# Altium PCB F4SDR.PcbDoc (part 1 of 2)
Units mil, origin at the board's own origin, x right, y up, seen from the top; angles counter-clockwise.
Board outline 1968.5 x 1968.5 mil, 4 copper layers (Top Layer, Internal Plane 1, Signal Layer 1, Bottom Layer), stack 64.634 mil thick; 238 components, 172 nets, 770 pads, 321 vias.
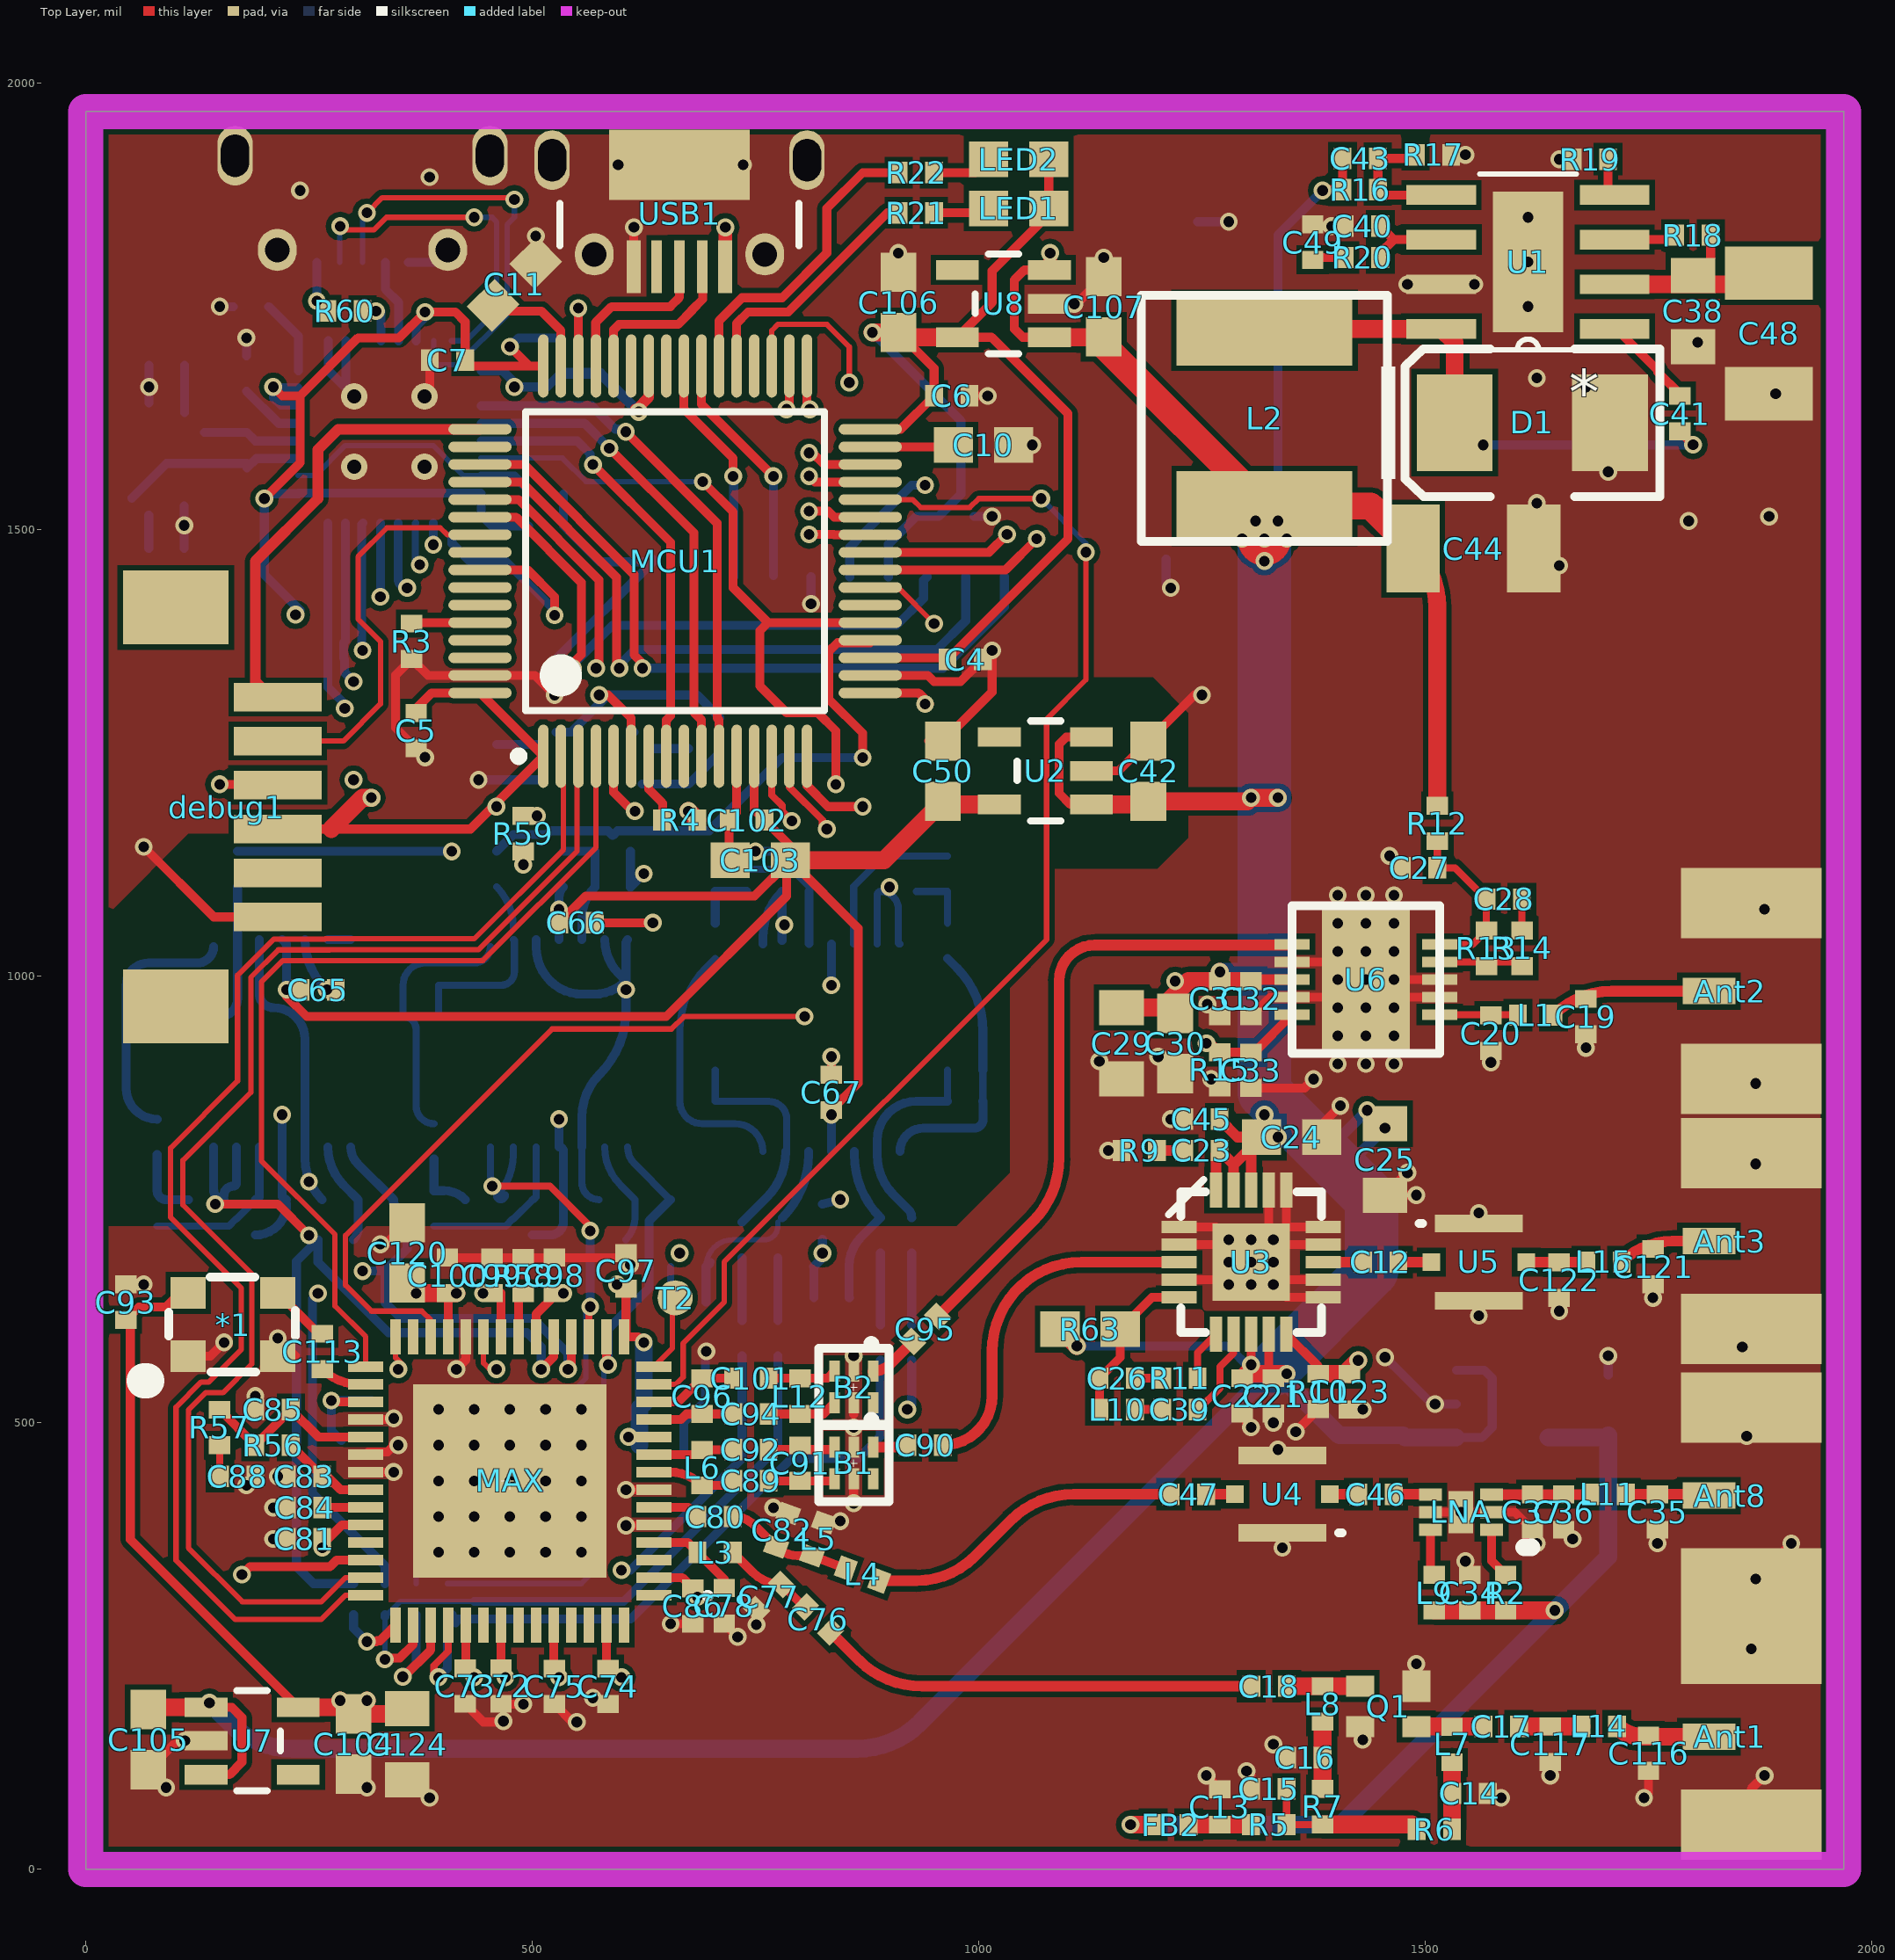
[diagram p0: Top Layer view]
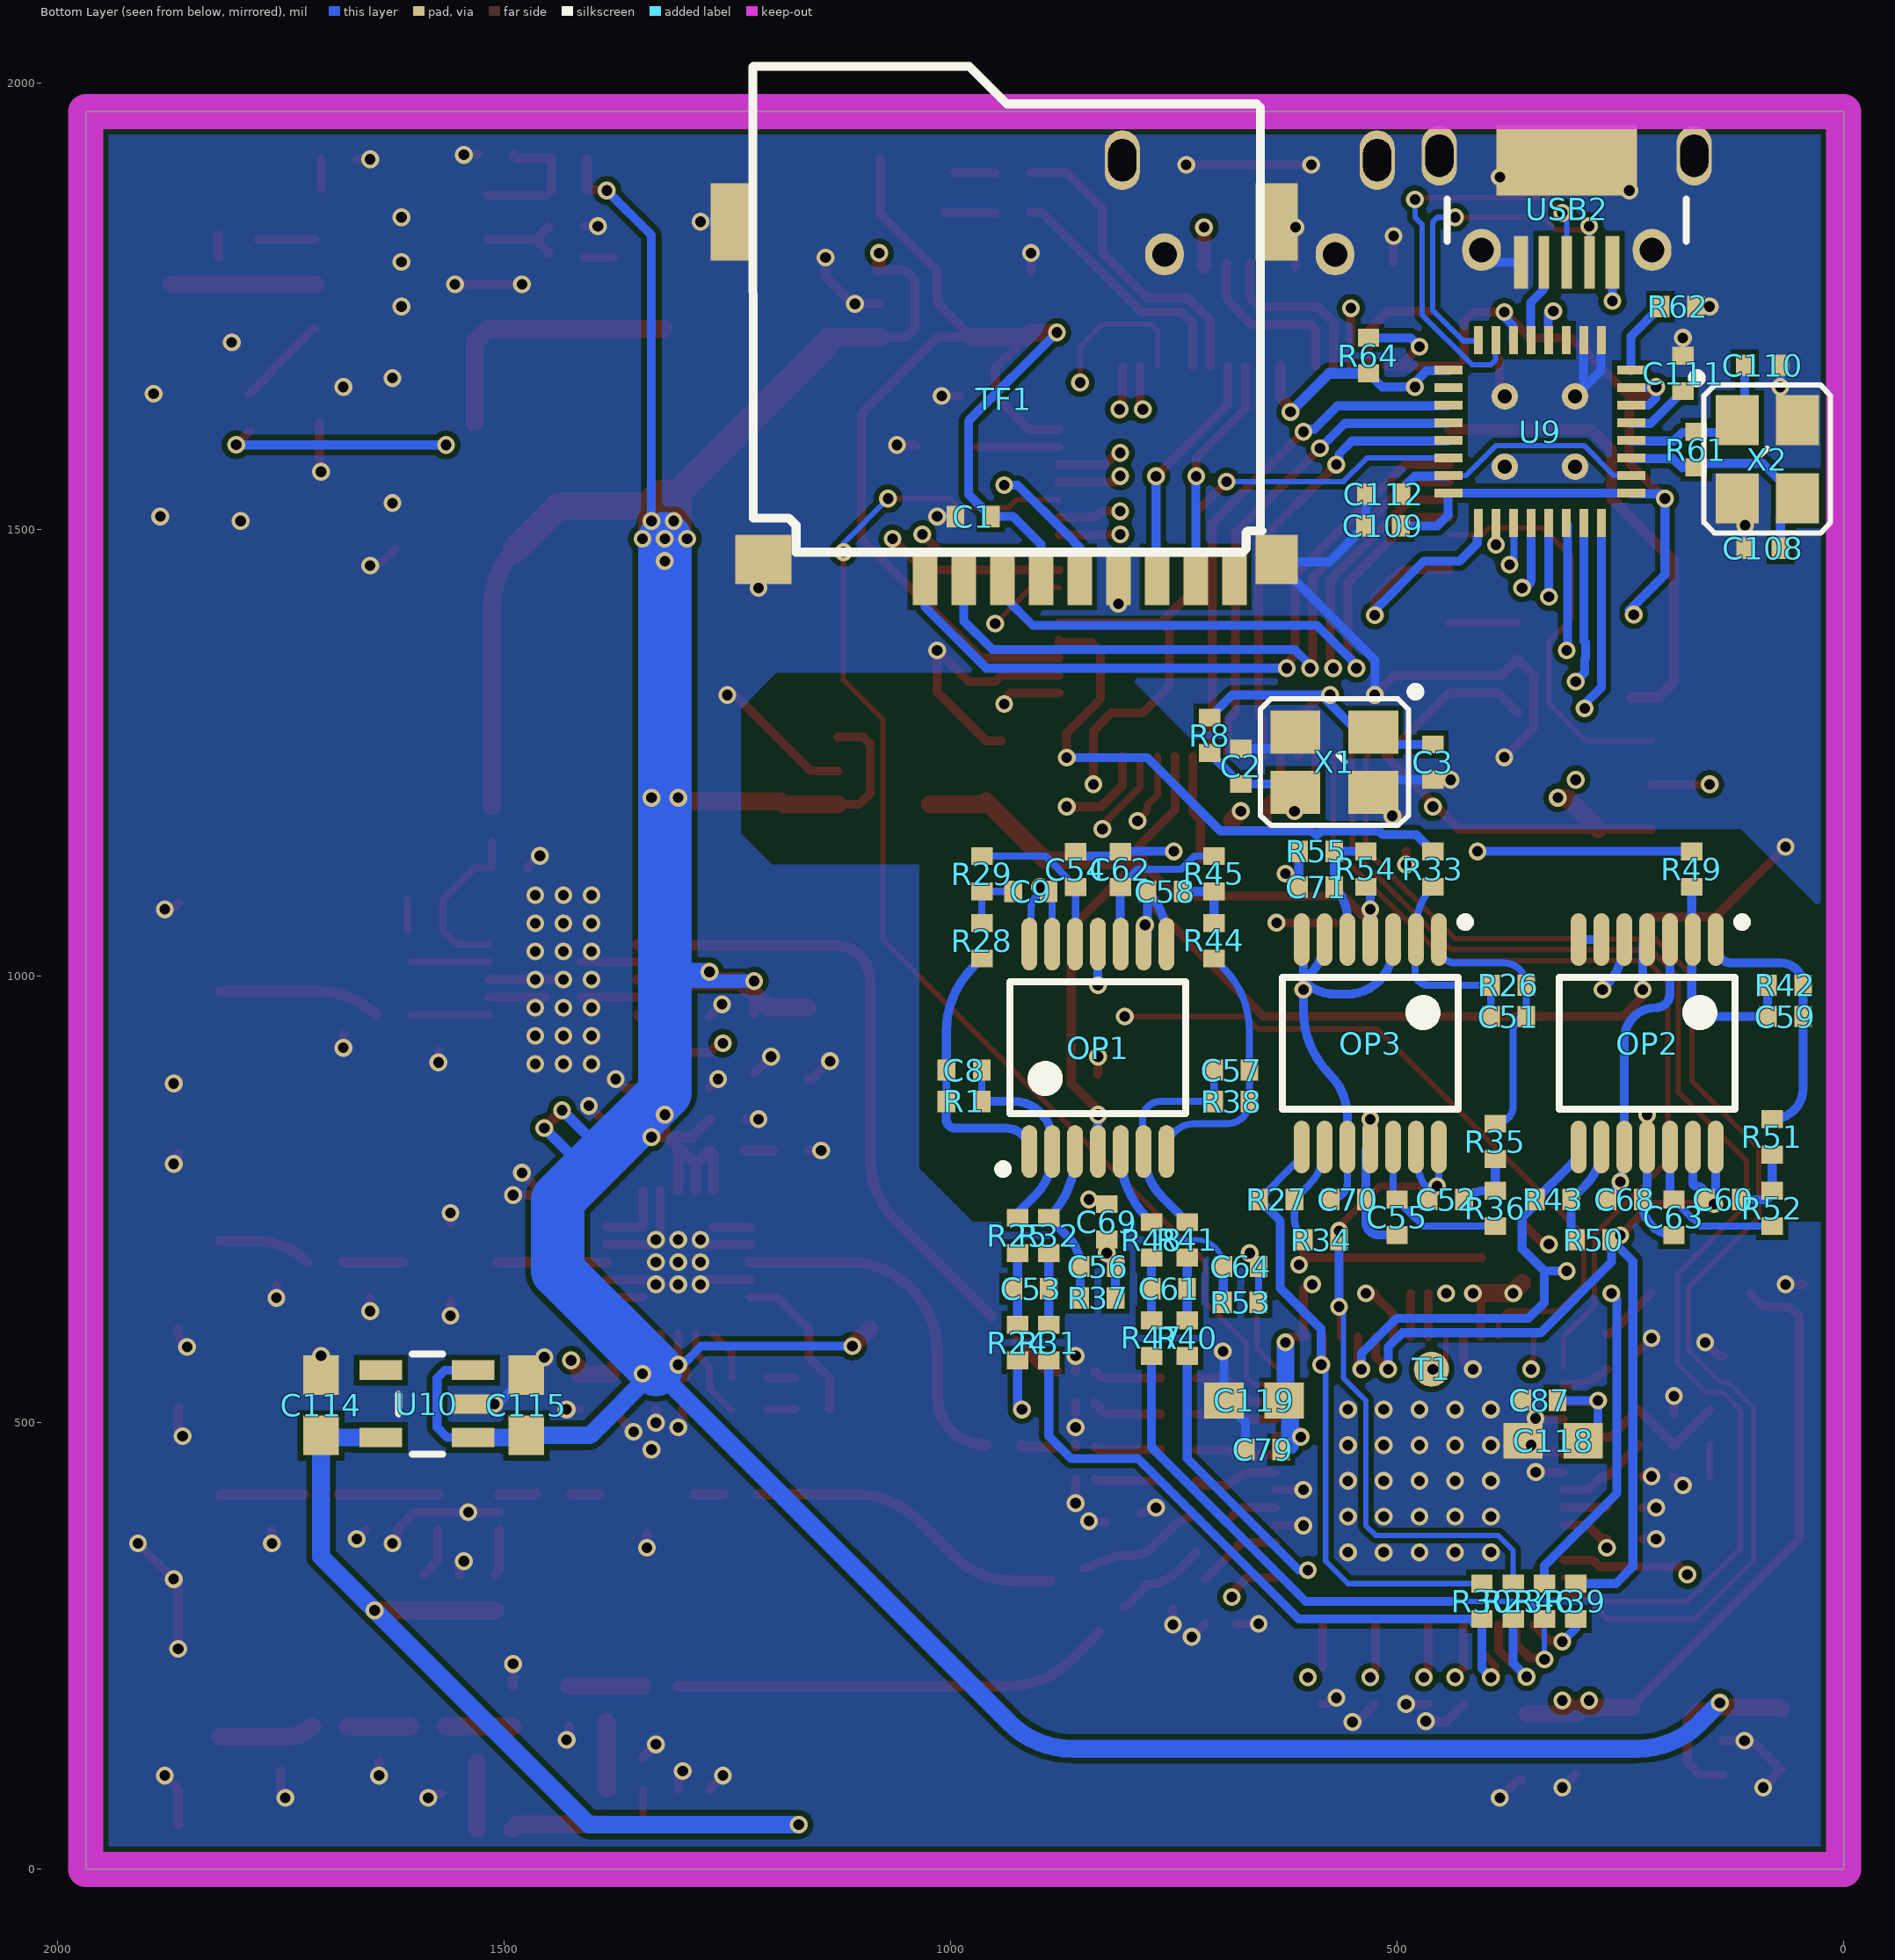
[diagram p1: Bottom Layer view, seen from below]
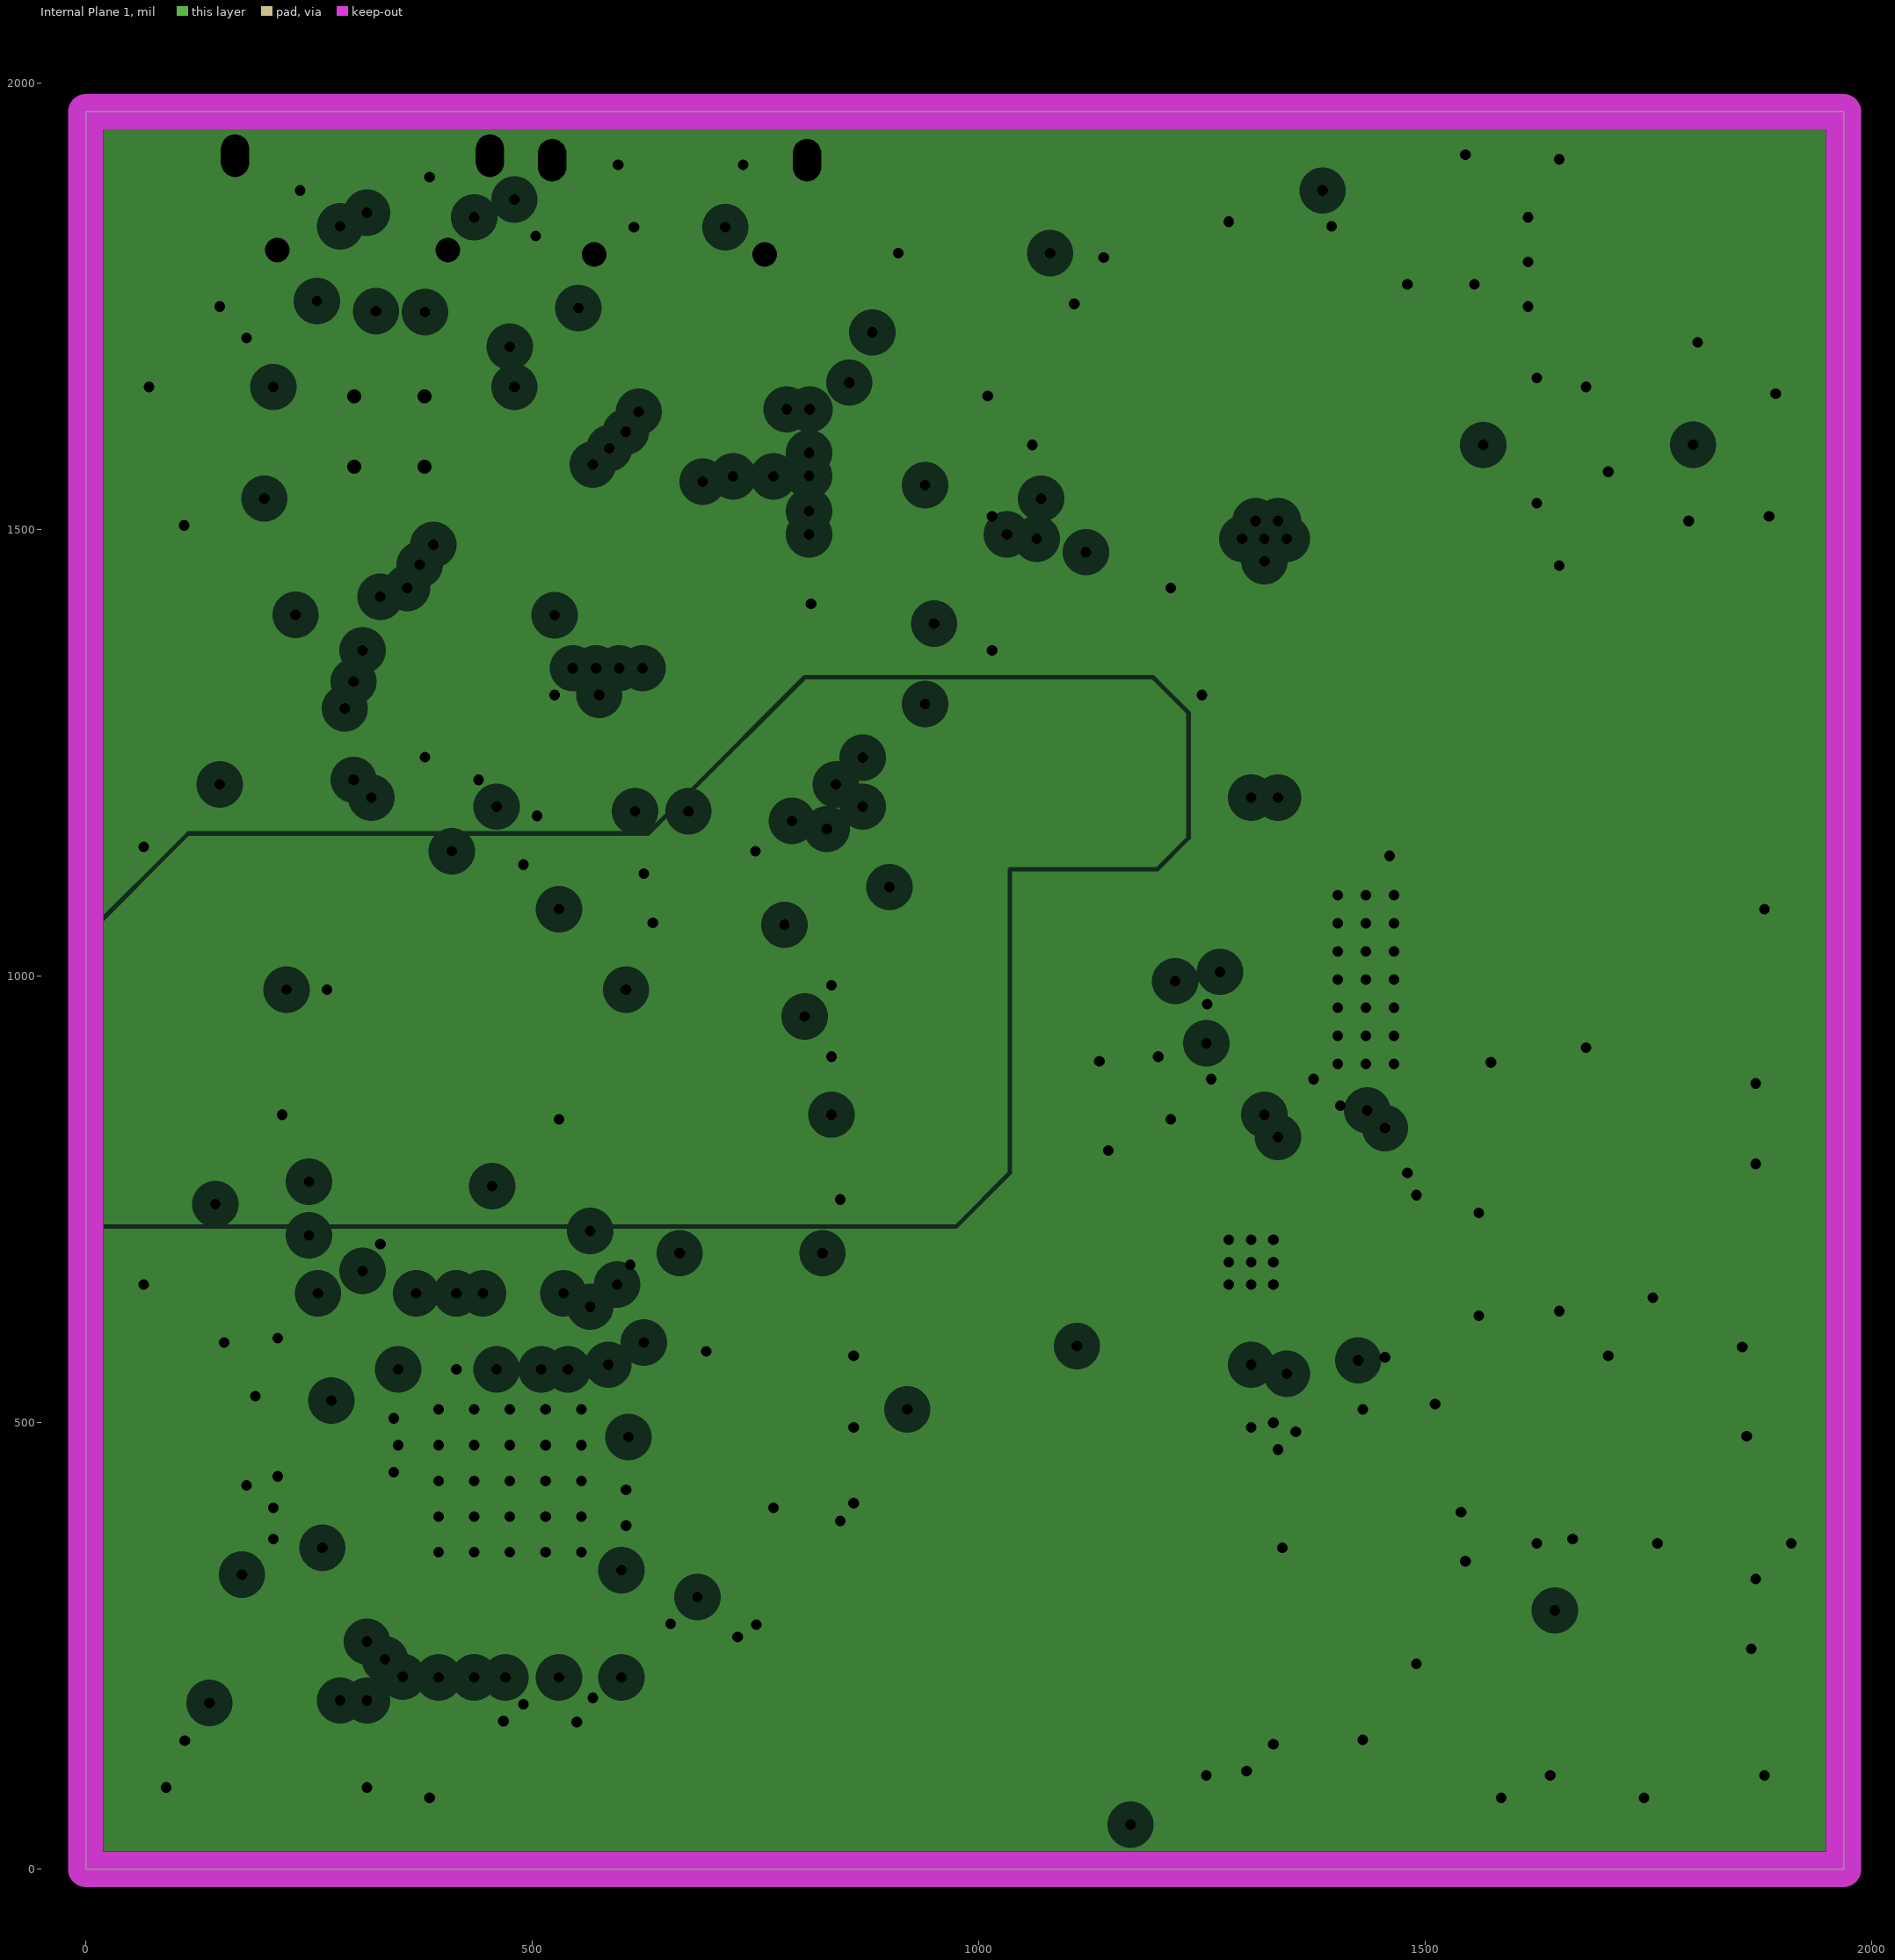
[diagram p2: Internal Plane 1, clearances drawn from the general rule]
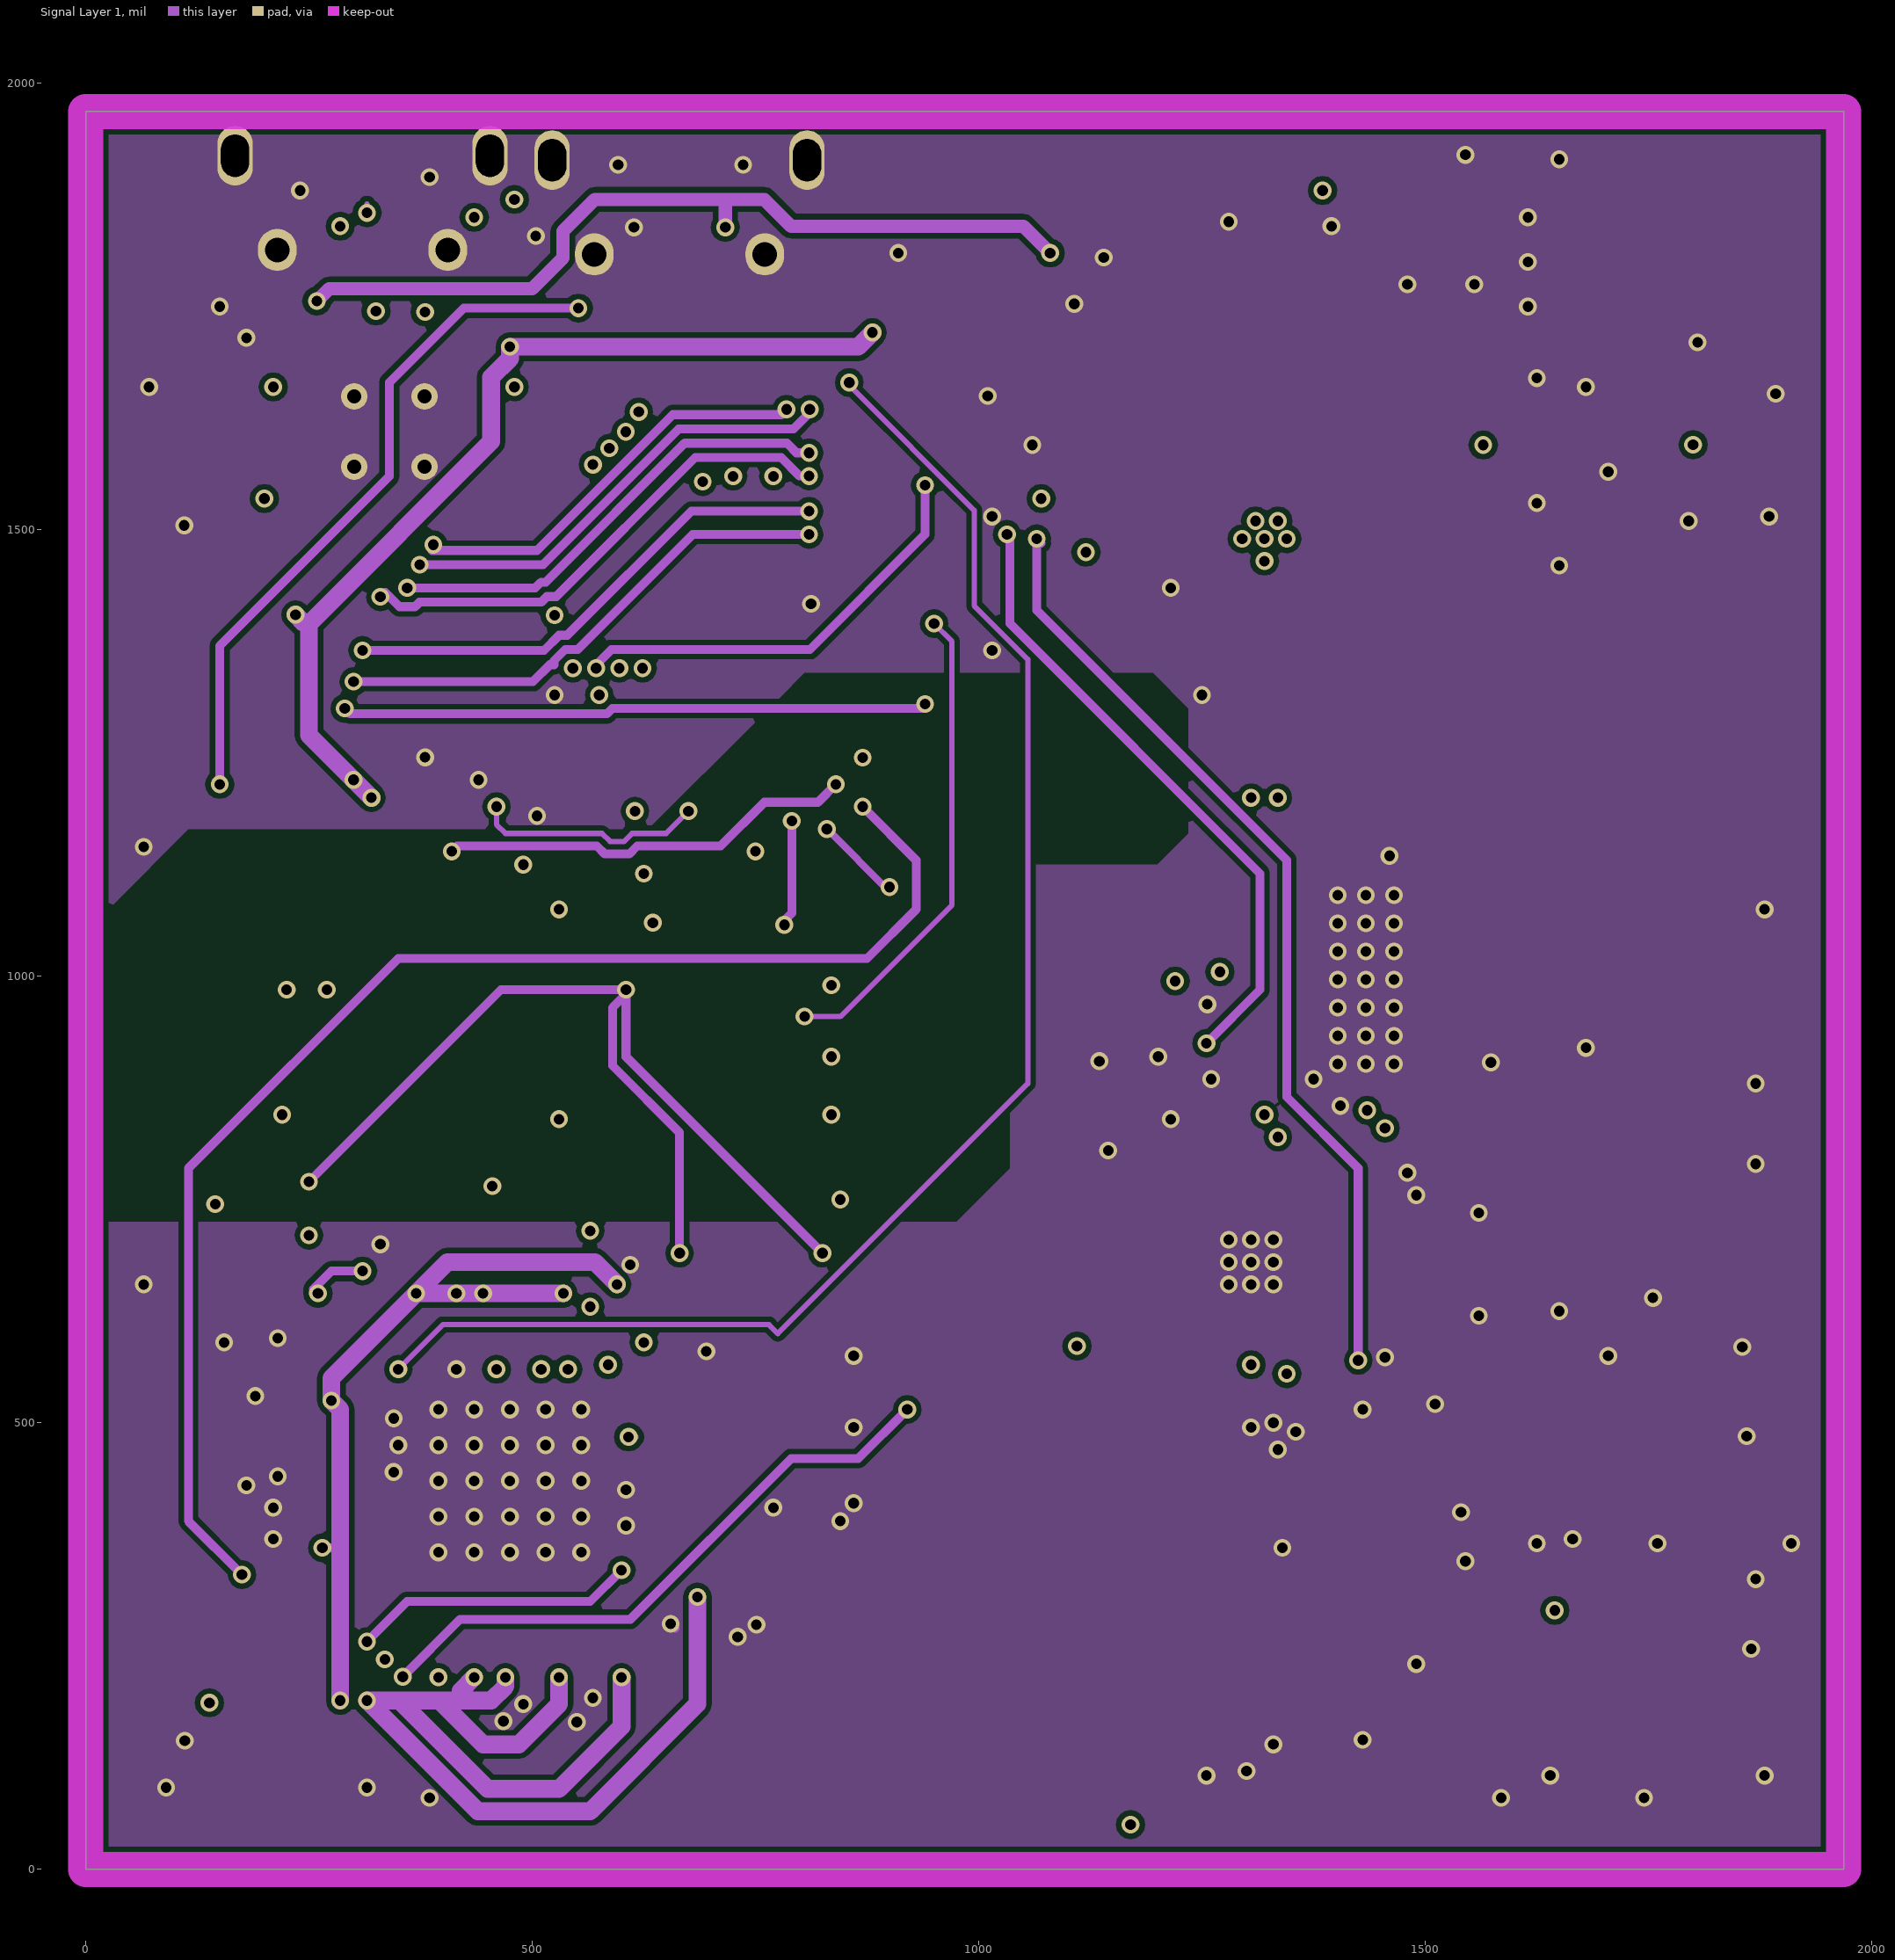
[diagram p3: Signal Layer 1]

## Layer stack, top to bottom
Top Solder: solder mask 0.4, Solder Resist, Dk 3.5
Top Layer: signal copper 1.4
Dielectric 1: core 6, FR-4, Dk 4.2
Internal Plane 1: plane copper 1.4169, net (Multiple Nets)
Dielectric 3: prepreg 47, Dk 4.2
Signal Layer 1: signal copper 1.4169
Dielectric 2: core 6, Dk 4.2
Bottom Layer: signal copper 1.4
Bottom Solder: solder mask 0.4, Solder Resist, Dk 3.5

## Board outline
0,0 1968.5,0 1968.5,1968.5 0,1968.5

## Design rules (kind name [scope] priority, off if disabled: settings)
Clearance [All] p1: gap=6
DiffPairsRouting [All] p1: maxlimit=10 minlimit=10 mostfreqgap=10 toplayer_minwidth=6 toplayer_maxwidth=15 toplayer_prefwidth=15 midlayer1_minwidth=6 midlayer1_maxwidth=15 midlayer1_prefwidth=15 bottomlayer_minwidth=6 bottomlayer_maxwidth=15 bottomlayer_prefwidth=15 maxuncoupledlength=500
MinimumSolderMaskSliver [All] p1 off: minsoldermaskwidth=10
PlaneClearance [All] p1: clearance=20
PlaneConnect [All] p1: planeconnectstyle=Direct reliefexpansion=20 reliefentries=4 reliefconductorwidth=10 reliefairgap=10
PolygonConnect [All] p1: connectstyle=Direct reliefconductorwidth=10 reliefentries=4 polygonreliefangle="90 Angle" airgapwidth=10
RoomDefinition PA [InComponentClass('PA')] p1 off: confinementstyle=ConfineIn formatcopy=TRUE lockcomponents=FALSE outline 4045,-40 11430,-40 11430,360 4045,360
RoomDefinition USB_HS [InComponentClass('USB_HS')] p2 off: confinementstyle=ConfineIn formatcopy=TRUE lockcomponents=FALSE outline 4090,1500 6900,1500 6900,3220 4090,3220
RoomDefinition power [InComponentClass('power')] p3 off: confinementstyle=ConfineIn formatcopy=TRUE lockcomponents=FALSE outline 7155,3255 9830,3255 9830,1480 7155,1480
RoomDefinition mcu [InComponentClass('mcu')] p4 off: confinementstyle=ConfineIn formatcopy=TRUE lockcomponents=FALSE outline 4055,190 10130,190 10130,1430 4055,1430
RoomDefinition MAX2829_RF [InComponentClass('MAX2829_RF')] p5 off: confinementstyle=ConfineIn formatcopy=TRUE lockcomponents=FALSE outline 4045,-1620 7715,-1620 7715,45 4045,45
RoomDefinition LNA [InComponentClass('LNA')] p6 off: confinementstyle=ConfineIn formatcopy=TRUE lockcomponents=FALSE outline 7845,-1590 10335,-1590 10335,20 7845,20
RoomDefinition IF [InComponentClass('IF')] p7 off: confinementstyle=ConfineIn formatcopy=TRUE lockcomponents=FALSE outline 4065,-2940 10325,-2940 10325,-1750 4065,-1750
RoutingVias [All] p1: holewidth=12 width=20 viastyle="Through Hole" minholewidth=12 minwidth=20 maxholewidth=28 maxwidth=50
SilkToBoardRegionClearance [All] p1 off:
SilkToSilkClearance [All] p1 off: silktosilkclearance=10
SilkToSolderMaskClearance [IsPad] p1 off: minsilkscreentomaskgap=10 clearancetoexposedcopper=TRUE
SolderMaskExpansion [All] p1: expansion=4
UnpouredPolygon [All] p1: allowunpoured=FALSE
Width [All] p1: maxlimit=60 minlimit=6 preferedwidth=6
22 further rules are at their usual default settings.

## Classes and differential pairs
component class USB_HS: C108 C109 C110 C111 C112 R60 R61 R62 R64 U9 USB2 X2
component class power: C38 C40 C41 C42 C43 C44 C48 C49 C50 C104 C105 C106 C107 C114 C115 C124 D1 L2 R16 R17 R18 R19 R20 U1 U2 U7 U8 U10
component class PA: Ant2 Ant3 C12 C19 C20 C21 C22 C23 C24 C25 C26 C27 C28 C29 C30 C31 C32 C33 C39 C45 C121 C122 C123 L1 L10 L15 R9 R10 R11 R12 R13 R14 R15 R63 U3 U5 U6
component class mcu: C1 C2 C3 C4 C5 C6 C7 C10 C11 C102 C103 debug1 LED1 LED2 MCU1 R3 R4 R8 R21 R22 R59 TF1 USB1 X1
component class MAX2829_RF: * *1 B1 B2 C72 C73 C74 C75 C76 C77 C78 C79 C80 C81 C82 C83 C84 C85 C86 C87 C88 C89 C90 C91 C92 C93 C94 C95 C96 C97 C98 C99 C100 C101 C113 C118 C119 C120 L3 L4 L5 L6 L12 MAX R56 R57 R58 T1 T2
component class LNA: Ant1 Ant8 C13 C14 C15 C16 C17 C18 C34 C35 C36 C37 C46 C47 C116 C117 FB2 L7 L8 L9 L11 L14 LNA Q1 R2 R5 R6 R7 U4
component class IF: C8 C9 C51 C52 C53 C54 C55 C56 C57 C58 C59 C60 C61 C62 C63 C64 C65 C66 C67 C68 C69 C70 C71 OP1 OP2 OP3 R1 R23 R24 R25 R26 R27 R28 R29 R30 R31 R32 R33 R34 R35 R36 R37 R38 R39 R40 R41 R42 R43 R44 R45 R46 R47 R48 R49 R50 R51 R52 R53 R54 R55
differential pair USB: +USB_P -USB_N

## Components (designator, comment, footprint, x,y, rotation, side; value= is the part's Value field where it differs from the comment)
*1 "OSC_40M" TXC_7Q 165,610 r0 top
Ant1 "Antenna" SMA-2 1865,50 r90 top
Ant2 "Antenna" SMA-2 1865,885 r90 top
Ant3 "Antenna" SMA-2 1865,605 r90 top
Ant8 "Antenna" SMA-2 1865,320 r90 top
B1 "Balun" HHM1711D1/HHM1732B1 860,455 r270 top
B2 "Balun" HHM1711D1/HHM1732B1 860,540 r270 top
C1 "0.1uF" 0402 975,1515 r180 bottom
C2 "22pF" 0402 675,1235 r90 bottom
C3 "22pF" 0402 460,1240 r270 bottom
C4 "0.1uF * 6" 0402 985,1355 r180 top
C5 "1n" 0402 370,1275 r90 top
C6 "1n" 0402 970,1650 r180 top
C7 "1n" 0402 405,1690 r0 top
C8 "22pF" 0402 985,895 r180 bottom
C9 "430pF" 0402 910,1095 r0 bottom
C10 "2.2uF" 0603 1005,1595 r0 top
C11 "2.2uF" 0603 480,1775 r45 top
C12 "Cap" 0402 1450,680 r0 top
C13 "Cap" 0402 1270,70 r270 top
C14 "Cap" 0402 1550,85 r0 top
C15 "Cap" 0402 1325,90 r180 top
C16 "Cap" 0402 1365,125 r0 top
C17 "Cap" 0402 1585,160 r0 top
C18 "Cap" 0402 1325,205 r0 top
C19 "Cap" 0402 1680,955 r270 top
C20 "Cap" 0402 1573.5,936.5 r270 top
C21 "Cap" 0402 1330,530 r90 top
C22 "Cap" 0402 1295,530 r90 top
C23 "Cap" 0402 1249.69,805 r0 top
C24 "1uF" 0603 1350,820 r0 top
C25 "Cap" 0805 1455,795 r90 top
C26 "Cap" 0402 1155,550 r0 top
C27 "Cap" 0402 1493.5,1121.5 r0 top
C28 "Cap" 0402 1588.5,1086.5 r180 top
C29 "Cap" 0805 1160,925 r270 top
C30 "Cap" 0603 1220,925 r270 top
C31 "Cap" 0402 1270,975 r270 top
C32 "Cap" 0402 1305,975 r270 top
C33 "Cap" 0402 1305,895 r270 top
C34 "Cap" 0402 1550,310 r270 top
C35 "Cap" 0402 1760,400 r90 top
C36 "Cap" 0402 1655,400 r90 top
C37 "Cap" 0402 1620,400 r90 top
C38 "Cap" 0805 1800,1745 r270 top
C39 "Cap" 0402 1225,515 r0 top
C40 "Cap" 0402 1430,1840 r180 top
C41 "Cap" 0402 1785,1630 r90 top
C42 "4.7uF" 0603 1190,1230 r270 top
C43 "NC" 0402 1427,1916 r0 top
C44 "Cap" 1210 1554,1479 r0 top
C45 "Cap" 0402 1250,840 r180 top
C46 "Cap" 0402 1445,420 r180 top
C47 "Cap" 0402 1235,420 r180 top
C48 "Cap" 1210 1885,1720 r270 top
C49 "Cap" 0402 1374,1822 r90 top
C50 "4.7uF" 0603 960,1230 r270 top
C51 "22pF" 0402 375,955 r0 bottom
C52 "430pF" 0402 445,750 r180 bottom
C53 "22pF" 0402 910,650 r180 bottom
C54 "100pF" 0402 860,1120 r270 bottom
C55 "100pF" 0402 500,730 r90 bottom
C56 "22pF" 0402 835,675 r180 bottom
C57 "22pF" 0402 685,895 r0 bottom
C58 "430pF" 0402 760,1095 r180 bottom
C59 "22pF" 0402 65,955 r0 bottom
C60 "430pF" 0402 135,750 r180 bottom
C61 "22pF" 0402 755,650 r0 bottom
C62 "100pF" 0402 810,1120 r270 bottom
C63 "100pF" 0402 190,730 r90 bottom
C64 "22pF" 0402 675,675 r180 bottom
C65 "0.1uF" 0402 260,985 r0 top
C66 "0.1uF" 0402 550,1060 r0 top
C67 "0.1uF" 0402 835,870 r90 top
C68 "0.1uF" 0402 245,750 r180 bottom
C69 "0.1uF" 0402 825,725 r90 bottom
C70 "0.1uF" 0402 555,750 r180 bottom
C71 "0.1uF" 0402 590,1100 r0 bottom
C72 "10nF" 0402 465,205 r90 top
C73 "10nF" 0402 425,205 r90 top
C74 "10nF" 0402 585,205 r270 top
C75 "10nF" 0402 525,205 r270 top
C76 "8.2pF" 0402 820,280 r315 top
C77 "1.0pF" 0402 765,305 r45 top
C78 "0.1uF" 0402 715,295 r90 top
C79 "10nF" 0402 650,470 r180 bottom
C80 "0.5pF" 0402 705,395 r180 top
C81 "0.1uF" 0402 245,370 r180 top
C82 "NC" 0402 780,380 r250 top
C83 "150pF" 0402 245,440 r180 top
C84 "0.1uF" 0402 245,405 r0 top
C85 "560pF" 0402 210,515 r180 top
C86 "10nF" 0402 680,295 r270 top
C87 "10nF" 0402 340,525 r0 bottom
C88 "10nF" 0402 170,440 r0 top
C89 "1.2pF" 0402 745,435 r180 top
C90 "0.1uF" 0402 940,475 r0 top
C91 "NC" 0402 800,455 r270 top
C92 "1.2pF" 0402 745,470 r180 top
C93 "0.1uF" 0402 45,635 r90 top
C94 "1.8pF" 0402 745,510 r180 top
C95 "0.1uF" 0402 940,605 r45 top
C96 "NC" 0402 690,530 r270 top
C97 "10nF" 0402 605,670 r90 top
C98 "10nF" 0402 525,665 r90 top
C99 "10nF" 0402 455,665 r90 top
C100 "10nF" 0402 405,665 r90 top
C101 "1.8pF" 0402 745,550 r180 top
C102 "1n" 0402 740,1175 r0 top
C103 "2.2uF" 0603 755,1130 r0 top
C104 "4.7uF" 0603 300,140 r90 top
C105 "4.7uF" 0603 70,145 r90 top
C106 "4.7uF" 0603 910,1755 r270 top
C107 "4.7uF" 0603 1140,1750 r270 top
C108 "10pF" 0402 90.63,1479.37 r180 bottom
C109 "1uF" 0402 515.63,1504.37 r0 bottom
C110 "10pF" 0402 90.63,1684.37 r0 bottom
C111 "1uF" 0402 180,1675 r90 bottom
C112 "1uF" 0402 515,1540 r0 bottom
C113 "0R/0.1uF" 0402 265,580 r270 top
C114 "4.7uF" 0603 1705,520 r270 bottom
C115 "4.7uF" 0603 1475,520 r270 bottom
C116 "Cap" 0402 1750,130 r90 top
C117 "Cap" 0402 1640,140 r90 top
C118 "1uF" 0603 325,480 r0 bottom
C119 "1uF" 0603 660,525 r0 bottom
C120 "1uF" 0603 360,690 r90 top
C121 "Cap" 0402 1755,675 r270 top
C122 "Cap" 0402 1650,660 r270 top
C123 "Cap" 0402 1415,535 r270 top
C124 "10uF, titanium" 0805 360,140 r90 top
D1 "Diode" LC-SMB(DO-214AA)_S5 1620,1620 r0 top
debug1 "debug" WFRSM125 215,1165 r270 top
FB2 "Res2" 0402 1215,50 r0 top
L1 "Inductor" 0402 1623.5,956.5 r0 top
L2 "Inductor" L7022 1320,1625 r270 top
L3 "Inductor" 0402 705,355 r180 top
L4 "Inductor" 0402 870,330 r160 top
L5 "2.0nH" 0402 820,370 r250 top
L6 "NC" 0402 690,450 r270 top
L7 "Inductor" 0402 1530,140 r270 top
L8 "Inductor" 0402 1385,185 r90 top
L9 "Inductor" 0402 1510,310 r270 top
L10 "Inductor" 0402 1155,515 r0 top
L11 "Inductor" 0402 1705,420 r180 top
L12 "Inductor" 0402 800,530 r270 top
L14 "Inductor" 0402 1695,160 r180 top
L15 "Inductor" 0402 1700,680 r0 top
LED1 "LED0" 0603 1045,1860 r180 top
LED2 "LED0" 0603 1045,1915 r180 top
LNA "SKY65404-31" SKY65404-31 1540,400 r180 top
MAX "MAX2828/2929" QFN_56\MAX2829 475,435 r180 top
MCU1 "STM32F103R8T6" LQFP64_N 660,1465 r90 top
OP1 "MCP6024" TSSOP14_44MM_065P 835,920 r90 bottom
OP2 "MCP6024" TSSOP14_44MM_065P 220,925 r270 bottom
OP3 "MCP6024" TSSOP14_44MM_065P 530,925 r270 bottom
Q1 "RF_BJT" SOT343-4(RF) 1490,160 r90 top
R1 "10k" 0402 985,860 r180 bottom
R2 "Res2" 0402 1590,310 r270 top
R3 "10k" 0402 365,1375 r90 top
R4 "10k" 0402 665,1175 r0 top
R5 "Res2" 0402 1325,50 r180 top
R6 "Res2" 0402 1510,45 r0 top
R7 "Res2" 0402 1385,70 r90 top
R8 "" 0402 710,1270 r270 bottom
R9 "Res2" 0402 1179.69,805 r0 top
R10 "Res2" 0402 1380,535 r90 top
R11 "Res2" 0402 1225,550 r0 top
R12 "Res2" 0402 1513.5,1171.5 r270 top
R13 "Res2" 0402 1568.5,1031.5 r270 top
R14 "Res2" 0402 1608.5,1031.5 r270 top
R15 "Res2" 0402 1270,895 r90 top
R16 "Res2" 0402 1427,1881 r0 top
R17 "Res2" 0402 1509,1920 r0 top
R18 "Res2" 0402 1800,1830 r180 top
R19 "Res2" 0402 1685,1915 r180 top
R20 "Res2" 0402 1430,1805 r180 top
R21 "10k" 0402 930,1855 r0 top
R22 "10k" 0402 930,1900 r0 top
R23 "NC" 0402 370,300 r90 bottom
R24 "5k" 0402 925,590 r270 bottom
R25 "5k" 0402 925,710 r270 bottom
R26 "10k" 0402 375,990 r0 bottom
R27 "1k" 0402 635,750 r180 bottom
R28 "787R" 0402 965,1040 r270 bottom
R29 "1.33k" 0402 965,1115 r270 bottom
R30 "NC" 0402 405,300 r90 bottom
R31 "5k" 0402 890,590 r270 bottom
R32 "5k" 0402 890,710 r270 bottom
R33 "5k" 0402 460,1120 r90 bottom
R34 "1k" 0402 585,705 r180 bottom
R35 "787R" 0402 390,815 r90 bottom
R36 "1.33k" 0402 390,740 r90 bottom
R37 "10k" 0402 835,640 r0 bottom
R38 "10k" 0402 685,860 r0 bottom
R39 "NC" 0402 300,300 r90 bottom
R40 "5k" 0402 735,595 r270 bottom
R41 "5k" 0402 735,705 r270 bottom
R42 "10k" 0402 65,990 r0 bottom
R43 "1k" 0402 325,750 r180 bottom
R44 "787R" 0402 705,1040 r270 bottom
R45 "1.33k" 0402 705,1115 r270 bottom
R46 "NC" 0402 335,300 r90 bottom
R47 "5k" 0402 775,595 r270 bottom
R48 "5k" 0402 775,705 r270 bottom
R49 "5k" 0402 170,1120 r90 bottom
R50 "1k" 0402 280,705 r180 bottom
R51 "787R" 0402 80,820 r90 bottom
R52 "1.33k" 0402 80,740 r90 bottom
R53 "10k" 0402 675,635 r0 bottom
R54 "5k" 0402 535,1120 r90 bottom
R55 "5k" 0402 590,1140 r0 bottom
R56 "620R" 0402 210,475 r180 top
R57 "300R" 0402 150,495 r270 top
R58 "11k" 0402 490,665 r270 top
R59 "FB" 0402 490,1160 r270 top
R60 "10k" 0402 290,1745 r0 top
R61 "1MR" 0402 165,1590 r270 bottom
R62 "12k 1%" 0402 185,1750 r0 bottom
R63 "TBD" 0603 1125,605 r180 top
R64 "10k" 0402 532.05,1695 r90 bottom
T1 "TestPad" "TestPad - 1mm" 461.56,560 r180 bottom
T2 "TestPad" "TestPad - 1mm" 660,640 r0 top
TF1 "TF" TF 635,1845 r0 bottom
U1 "TPS54340" D8-Pad 1615,1800 r180 top
U2 "LP5907" SOT23-5 1075,1230 r90 top
U3 "SE5004L" SE5004L 1305,680 r0 top
U4 "BF2012" LFB2H5 1340,420 r180 top
U5 "BF2012" LFB2H5 1560,680 r0 top
U6 "Sky65174-21" SKY65174-21 1433.5,996.5 r0 top
U7 "LP5907" SOT23-5 186,144 r270 top
U8 "RT9193/RT9013/LP5907" SOT23-5 1028,1753 r90 top
U9 "USB3300_1" USB3300 340,1610 r270 bottom
U10 "LP5907" SOT23-5 1586,521 r90 bottom
USB1 "USB Micro Type B" MICRO-YZX 665,2025 r180 top
USB2 "USB Micro Type B" MICRO-YZX 310,2030 r0 bottom
X1 "8mhz" OSCILLATOR-3.2X2.5 570,1240 r0 bottom
X2 "24mhz" OSCILLATOR-3.2X2.5 85.63,1579.37 r270 bottom

## Footprints (in the part's own frame and the unit in brackets; to place one, negate y for a bottom-side part, rotate by r counter-clockwise, add the part's x,y. Pads: shape width x height; smd on the part's side, far side on the other; paste and mask are expansions set on the pad)
0402 [mil] "0402-RES"
  rect 20x24 smd: 1(-19.68,0) 2(20,0)
0603 [mil] "0603-RES"
  rect 44x40 smd: 1(-33.46,0) 2(34,0)
0805 [mil]
  rect 39.37x50 smd: 1(-40,0) 2(40,0)
  body extent -50,-30 50,30, height 31
1210 [mm]
  rect 1.52x2.5 smd: 1(-1.715,0) 2(1.715,0)
D8-Pad [mil]
  rect 78.74x157.48 smd: 0(0,0)
  rect 78x22 smd: 1(-97,75) 2(-97,25) 3(-97,-25) 4(-97,-75) 5(97,-75) 6(97,-25) 7(97,25) 8(97,75)
  silkscreen extent -54,-98 54,98, body extent -118,-96 118,96, height 64
HHM1711D1/HHM1732B1 [mm]
  rect 0.6x0.3 smd: 1(-0.45,0.55) 2(-0.45,0) 3(-0.45,-0.55) 4(0.45,-0.55) 5(0.45,0) 6(0.45,0.55)
  silkscreen extent -1.32,-1 1.1,1
L7022 [mm]
  rect 2x5 smd: 1(-2.5,0) 2(2.5,0)
  silkscreen extent -3.5,-3.5 3.5,3.5
LC-SMB(DO-214AA)_S5 [mil]
  rect 85x107.99 smd: 1(87.01,0) 2(-87.01,0)
  silkscreen extent -169,-83 143,83
LFB2H5 [mm]
  rect 2.5x0.5 smd: 0(0,1.1) 0(0,-1.1)
  rect 0.5x0.5 smd: 1(-1.35,0) 2(1.35,0)
  silkscreen extent -1.7,1.1 -1.6,1.1, body extent -1.25,-1 1.25,1, height 0.9
LQFP64_N [mm]
  oval 1.8x0.3 smd: 1(-5.55,3.75) 2(-5.55,3.25) 3(-5.55,2.75) 4(-5.55,2.25) 5(-5.55,1.75) 6(-5.55,1.25) 7(-5.55,0.75) 8(-5.55,0.25) 9(-5.55,-0.25) 10(-5.55,-0.75) 11(-5.55,-1.25) 12(-5.55,-1.75) 13(-5.55,-2.25) 14(-5.55,-2.75) 15(-5.55,-3.25) 16(-5.55,-3.75) 33(5.55,-3.75) 34(5.55,-3.25) 35(5.55,-2.75) 36(5.55,-2.25) 37(5.55,-1.75) 38(5.55,-1.25) 39(5.55,-0.75) 40(5.55,-0.25) 41(5.55,0.25) 42(5.55,0.75) 43(5.55,1.25) 44(5.55,1.75) 45(5.55,2.25) 46(5.55,2.75) 47(5.55,3.25) 48(5.55,3.75)
  oval 0.3x1.8 smd: 17(-3.75,-5.55) 18(-3.25,-5.55) 19(-2.75,-5.55) 20(-2.25,-5.55) 21(-1.75,-5.55) 22(-1.25,-5.55) 23(-0.75,-5.55) 24(-0.25,-5.55) 25(0.25,-5.55) 26(0.75,-5.55) 27(1.25,-5.55) 28(1.75,-5.55) 29(2.25,-5.55) 30(2.75,-5.55) 31(3.25,-5.55) 32(3.75,-5.55) 49(3.75,5.55) 50(3.25,5.55) 51(2.75,5.55) 52(2.25,5.55) 53(1.75,5.55) 54(1.25,5.55) 55(0.75,5.55) 56(0.25,5.55) 57(-0.25,5.55) 58(-0.75,5.55) 59(-1.25,5.55) 60(-1.75,5.55) 61(-2.25,5.55) 62(-2.75,5.55) 63(-3.25,5.55) 64(-3.75,5.55)
  silkscreen extent -5.67,-4.25 4.25,4.57
MICRO-YZX [mm]
  rect 0.4x1.5 smd: 1(-1.3,5.85) 5(1.3,5.85)
  rect 0.3x1.5 smd: 2(-0.65,5.85) 3(0,5.85) 4(0.65,5.85)
  oval 1x1.7 hole 0.8 slot 1.2 at 90 deg: 5(-3.625,2.82) 5(3.625,2.82)
  oval 1.1x1.2 hole 0.7: 5(-2.425,5.5) 5(2.425,5.5)
  rect 4x2 smd: 5(0,2.95)
  silkscreen extent -3.4,4.05 3.4,5.25
OSCILLATOR-3.2X2.5 [mil] "OSCILLATOR-3.2X2.5"
  rect 56x48 smd: 1(-43.31,-33.46) 2(44,-33.46) 3(44,34) 4(-43.31,34)
  silkscreen extent -95,-83 83,71
QFN_56\MAX2829 [mm]
  rect 5.5x5.5 smd: 0(0,0)
  rect 1x0.3 smd: 1(-4.1,3.25) 2(-4.1,2.75) 3(-4.1,2.25) 4(-4.1,1.75) 5(-4.1,1.25) 6(-4.1,0.75) 7(-4.1,0.25) 8(-4.1,-0.25) 9(-4.1,-0.75) 10(-4.1,-1.25) 11(-4.1,-1.75) 12(-4.1,-2.25) 13(-4.1,-2.75) 14(-4.1,-3.25) 29(4.1,-3.25) 30(4.1,-2.75) 31(4.1,-2.25) 32(4.1,-1.75) 33(4.1,-1.25) 34(4.1,-0.75) 35(4.1,-0.25) 36(4.1,0.25) 37(4.1,0.75) 38(4.1,1.25) 39(4.1,1.75) 40(4.1,2.25) 41(4.1,2.75) 42(4.1,3.25)
  rect 0.3x1 smd: 15(-3.25,-4.1) 16(-2.75,-4.1) 17(-2.25,-4.1) 18(-1.75,-4.1) 19(-1.25,-4.1) 20(-0.75,-4.1) 21(-0.25,-4.1) 22(0.25,-4.1) 23(0.75,-4.1) 24(1.25,-4.1) 25(1.75,-4.1) 26(2.25,-4.1) 27(2.75,-4.1) 28(3.25,-4.1) 43(3.25,4.1) 44(2.75,4.1) 45(2.25,4.1) 46(1.75,4.1) 47(1.25,4.1) 48(0.75,4.1) 49(0.25,4.1) 50(-0.25,4.1) 51(-0.75,4.1) 52(-1.25,4.1) 53(-1.75,4.1) 54(-2.25,4.1) 55(-2.75,4.1) 56(-3.25,4.1)
  silkscreen extent -5.7,-0.25 0.25,3.34, body extent -4,-4 4,4, height 0.75
SE5004L [mm]
  rect 2.2x2.2 smd: 0(0,0)
  rect 1x0.35 smd: 1(-2.05,1) 2(-2.05,0.5) 3(-2.05,0) 4(-2.05,-0.5) 5(-2.05,-1) 11(2.05,-1) 12(2.05,-0.5) 13(2.05,0) 14(2.05,0.5) 15(2.05,1)
  rect 0.35x1 smd: 6(-1,-2.05) 7(-0.5,-2.05) 8(0,-2.05) 9(0.5,-2.05) 10(1,-2.05) 16(1,2.05) 17(0.5,2.05) 18(0,2.05) 19(-0.5,2.05) 20(-1,2.05)
  silkscreen extent -2.35,-2 2,2.35, body extent -2,-2 2,2, height 0.85
SKY65174-21 [mm]
  rect 2.5x4.4 smd: 0(0,0)
  rect 1x0.3 smd: 1(-2.1,1) 2(-2.1,0.5) 3(-2.1,0) 4(-2.1,-0.5) 5(-2.1,-1) 6(2.1,-1) 7(2.1,-0.5) 8(2.1,0) 9(2.1,0.5) 10(2.1,1)
  silkscreen extent -2.1,-2.1 2.1,2.1
SKY65404-31 [mm]
  rect 0.7x1.2 smd: 0(0,0)
  rect 0.65x0.35 smd: 1(-0.87,0.5) 2(-0.87,0) 3(-0.87,-0.5) 4(0.87,-0.5) 5(0.87,0) 6(0.87,0.5)
  silkscreen extent -2,1 -1.8,1
SMA-2 [mm]
  rect 0.75x1.5 smd: 1(2.5,1.2)
  rect 2x4 smd: GND(0,0) GND(5,0)
SOT23-5 [mil] "SOT23-5"
  rect 22x48 smd: 1(-37.4,-51.19) 2(0,-51.19) 3(38,-51.19) 4(38,52) 5(-37.4,52)
  silkscreen extent -56,-17 56,32
SOT343-4(RF) [mm]
  rect 0.6x0.8 smd: 1(0,0) 3(1.15,1.6) 4(0,1.6)
  rect 0.9x0.8 smd: 2(1.15,0)
"TestPad - 1mm" [mm]
  round 1 smd: 1(0,0)
TF [mm]
  rect 0.7x1.6 smd: 1(10,10.1) 2(8.9,10.1) 3(7.8,10.1) 4(6.7,10.1) 5(5.6,10.1) 6(4.5,10.1) 7(3.4,10.1) 8(2.3,10.1) 9(1.2,10.1)
  rect 1.2x2.2 smd: SHELL(0,0) SHELL(15.5,0)
  rect 1.2x1.4 smd: SHELL(0,9.6)
  rect 1.6x1.4 smd: SHELL(14.6,9.6)
  silkscreen extent 0.41,-4.42 14.9,9.4
TSSOP14_44MM_065P [mm]
  oval 1.5x0.45 smd: 1(-2.95,1.95) 2(-2.95,1.3) 3(-2.95,0.65) 4(-2.95,0) 5(-2.95,-0.65) 6(-2.95,-1.3) 7(-2.95,-1.95) 8(2.95,-1.95) 9(2.95,-1.3) 10(2.95,-0.65) 11(2.95,0) 12(2.95,0.65) 13(2.95,1.3) 14(2.95,1.95)
  silkscreen extent -3.57,-2.5 1.88,2.83
TXC_7Q [mm]
  rect 1x0.9 smd: 1(-1.275,-0.9) 2(1.275,-0.9) 3(1.275,0.9) 4(-1.275,0.9)
  silkscreen extent -2.52,-1.6 1.78,1.35
USB3300 [mm]
  round 0.75 hole 0.4: 0(-1,-1) 0(-1,1) 0(1,-1) 0(1,1)
  rect 0.8x0.25 smd: 1(-2.6,1.75) 2(-2.6,1.25) 3(-2.6,0.75) 4(-2.6,0.25) 5(-2.6,-0.25) 6(-2.6,-0.75) 7(-2.6,-1.25) 8(-2.6,-1.75) 17(2.6,-1.75) 18(2.6,-1.25) 19(2.6,-0.75) 20(2.6,-0.25) 21(2.6,0.25) 22(2.6,0.75) 23(2.6,1.25) 24(2.6,1.75)
  rect 0.25x0.8 smd: 9(-1.75,-2.6) 10(-1.25,-2.6) 11(-0.75,-2.6) 12(-0.25,-2.6) 13(0.25,-2.6) 14(0.75,-2.6) 15(1.25,-2.6) 16(1.75,-2.6) 25(1.75,2.6) 26(1.25,2.6) 27(0.75,2.6) 28(0.25,2.6) 29(-0.25,2.6) 30(-0.75,2.6) 31(-1.25,2.6) 32(-1.75,2.6)
  body extent -2.5,-2.5 2.5,2.5, height 0.85
WFRSM125 [mm]
  rect 0.81x2.5 smd: 1(-3.75,0) 2(-2.5,0) 3(-1.25,0) 4(0,0) 5(1.25,0) 6(2.5,0)
  rect 2.1x3 smd: shell(-6.3,-2.9) shell(5.05,-2.9)
  body extent -6.79,-3.82 5.46,0.38, height 3.4

## Part data
C1 C2 C3 C4 C5 C6 C7 C8 C9 C10 C11 C51 C52 C53 C54 C55 C56 C57 C58 C59 C60 C61 C62 C63 C64 C65 C66 C67 C68 C69 C70 C71 C72 C73 C74 C75 C76 C77 C78 C79 C80 C81 C82 C83 C84 C85 C86 C87 C88 C89 C90 C91 C92 C93 C94 C95 C96 C97 C98 C99 C100 C101 C102 C103 C108 C109 C110 C111 C112 C113 C118 C119 C120: library part CAP0402-CAP, "<b>Capacitor</b> / Standard 0603 ceramic capacitor, and 0.1\" leaded capacitor."
C12 C13 C14 C15 C16 C17 C18 C19 C20 C21 C22 C23 C25 C26 C27 C28 C29 C30 C31 C32 C33 C34 C35 C36 C37 C38 C39 C40 C41 C44 C45 C46 C47 C48 C49 C116 C117 C121 C122 C123: "Capacitor"
C24 C42 C43 C50 C104 C105 C106 C107 C114 C115 C124: library part Cap, "Capacitor"
D1: "Default Diode"
FB2 R2 R5 R6 R7 R9 R10 R11 R12 R13 R14 R15 R16 R17 R18 R19 R20: "Resistor"
L5 L6: library part Inductor, "Inductor"
LED1 LED2: "Typical INFRARED GaAs LED"
MCU1: "STM32 ARM-based 32-bit MCU with 64 Kbytes Flash, 64-pin LQFP, Industrial Temperature"
OP1 OP2 OP3: library part OP-SOP14
R1 R3 R4 R8 R21 R22 R23 R24 R25 R26 R27 R28 R29 R30 R31 R32 R33 R34 R35 R36 R37 R38 R39 R40 R41 R42 R43 R44 R45 R46 R47 R48 R49 R50 R51 R52 R53 R54 R55 R56 R57 R58 R59 R60 R61 R62 R63 R64: library part Res2, "Resistor"
U8: library part LP5907
USB1 USB2: library part USB_Micro_TypeB, "Connector SMD USB Micro Type B middle mount"
X1 X2: library part OSCILLATOR-3.2X2.5, "Crystal Oscillator in 3.2x2.5 SMD"

## Via types
v1: diameter 20, hole 12, Top Layer to Bottom Layer, 291 vias
v2: diameter 19.68, hole 11.81, Top Layer to Bottom Layer, 21 vias
v3: diameter 20/20/20 (per signal layer), hole 12, Top Layer to Bottom Layer, 9 vias

## Nets (pads, with @x,y where several pads share a name; then routed paths per layer and width w, separated by ;. In a path a pad name is that pad's centre, name@x,y a point inside that pad or via, vN(x,y) a via of type N, cw(c..) or ccw(c..) an arc to the next point about the centre after c; other vN are vias at no path point)
3.3A: C50.2 C65.1 C66.1 C67.1 C102.2 C103.2 MCU1.13 OP1.4 OP2.4 OP3.4 R54.1 U2.5 | length 1822.7
  Top Layer w10: v1@225,977.44 247.44,955 650,955 785,1090 C103.2@785,1126 ; v1(530,1075) 530.32,1074.69 C66.1@530.32,1060 560.32,1090 749,1090 C103.2@785,1126 ; MCU1.13@748.58,1246.5 748.58,1186.42 C102.2@760,1175 C103.2@789,1146 ; C67.1@835,850.32 865,880.32 865,1054 C103.2@789,1130 C103.2@785,1126
  Top Layer w20: C103.2@789,1130 894,1130 C50.2@960,1196 ; C50.2@963.4,1192.6 U2.5@1023,1192.6
  Bottom Layer w10: OP2.4@220,1041.14 225,1036.14 v1(225,985) ; OP3.4@530,1041.14 v1(530,1075) 530,1088.24 cw(c547.07,1088.24) R54.1@535,1100.31 ; OP1.4@835,803.86 v1(835,845)
3.3D: C1.2 C4.2 C5.2 C6.2 C7.2 C106.2 C109.1 debug1.4 LED1.1 LED2.1 MCU1.1 MCU1.19 MCU1.32 MCU1.48 MCU1.64 R4.2 R64.2 TF1.4 U8.5 U9.6 U9.16 U9.25 U9.30 U9.31 | length 4540
  Top Layer w10: v1(200,1535) 240,1575 240,1650 ; v1(210,1660) 220,1650 240,1650 ; debug1.4@215,1165 275,1165 430.87,1165 MCU1.1@512.36,1246.5 MCU1.64@441.5,1317.36 387.36,1317.36 C5.2@365,1295 ; C7.2@425,1690 425,1733 414,1744 v1(380,1744) 351,1715 305,1715 240,1650 ; C7.2@431.5,1683.5 496.5,1683.5 ; v1(475,1705) 496.5,1683.5 ; MCU1.48@512.36,1683.5 496.5,1683.5 ; MCU1.19@878.5,1356.73 C4.2@963.27,1356.73 ; MCU1.32@878.5,1612.64 912.64,1612.64 C6.2@950,1650 950,1681 C106.2@915.4,1715.6 ; C4.2@965,1355 1100,1490 1100,1630 1014.4,1715.6 U8.5@976,1715.6 1015,1754.6 1015,1790 1078.46,1853.46 LED1.1@1078.46,1860 LED2.1@1078.46,1915
  Top Layer w20: 275,1165 310,1200 v1(320,1200) ; v1(675,1185) R4.2@685,1175 ; v1(881,1721) C106.2@910,1721 ; C106.2@915.4,1715.6 U8.5@976,1715.6
  Signal Layer 1 w6: v1(460,1190) 460,1170 470,1160 578.13,1160 587.13,1151 602.87,1151 611.87,1160 650,1160 v1(675,1185)
  Signal Layer 1 w10: v1(460,1190) v1@460,1195
  Signal Layer 1 w20: v1(235,1405) 245,1395 250,1395 ; v1(320,1200) v1(300,1220) 250,1270 250,1395 ; v1(881,1721) 865,1705 v1(475,1705) 475,1691.77 454,1670.77 454,1599 250,1395
  Bottom Layer w10: v1(210,1660) 210,1647.94 218.41,1639.53 U9.30@237.64,1639.53 ; v1@210.79,1659.21 U9.31@237.64,1659.21 ; v1(235,1405) 240,1410 200,1450 v1(200,1535) 205.47,1540.47 U9.25@238.27,1540.47 ; U9.25@237.64,1541.1 U9.16@442.36,1541.1 ; U9.6@370.16,1711.73 370.16,1728.27 380,1738.12 v1(380,1744) ; U9.16@442.99,1540.47 442.99,1516.38 455,1504.37 C109.1@495.94,1504.37 ; v1(475,1705) 485,1715 R64.2@532.05,1715 ; v1(881,1721) 980,1622 980,1540 C1.2@955,1515 930,1515 898.78,1483.78 TF1.4@898.78,1447.36
3.3LNA: C34.2 C114.2 FB2.1 L9.2 R2.2 U10.5 | length 1020.2
  Top Layer w20: v1(1170,50) FB2.1@1195.31,50 ; L9.2@1510,290 C34.2@1550,290 R2.2@1590,290 v1(1645,290)
  Bottom Layer w20: v1(1170,50) 1405,50 v1(1645,290) 1705,350 C114.2@1705,486 ; U10.5@1638,483.6 C114.2@1702.6,483.6
3.3RF: *1.4 C72.2 C73.2 C74.1 C75.1 C79.2 C81.1 C86.1 C87.1 C93.1 C97.1 C98.1 C99.1 C100.1 C104.2 C118.1 C119.1 C120.1 C124.2 MAX.2 MAX.10 MAX.15 MAX.20 MAX.22 MAX.25 MAX.31 MAX.38 MAX.47 MAX.49 MAX.52 MAX.55 U7.5 | length 3905.6
  Top Layer w10: *1.4@105,645 89.68,629.68 59.68,629.68 50,620 50,369.4 U7.5@238,181.4 ; C81.1@264.68,370 271.34,370 287.13,385.79 MAX.38@313.58,385.79 ; v1@276.42,523.58 MAX.31@313.58,523.58 ; C100.1@405,645.32 406.1,644.21 MAX.25@406.1,596.42 ; C73.2@425.79,225.79 MAX.47@425.79,273.58 ; C99.1@465,645.32 465.16,645.16 MAX.22@465.16,596.42 ; C72.2@465.16,225.16 MAX.49@465.16,273.58 ; MAX.20@504.53,596.42 504.53,621.97 525,642.44 C98.1@525,645.32 ; C75.1@524.21,225.47 MAX.52@524.21,273.58 ; C74.1@583.27,226.42 MAX.55@583.27,273.58 ; C97.1@605,650.32 605,598.46 MAX.15@602.95,596.42 618.58,596.42 v1(625,590) ; v1(607.88,484.21) 608.67,485 635.63,485 MAX.10@636.42,484.21 ; MAX.2@636.42,326.73 667.95,326.73 C86.1@680,314.68
  Top Layer w20: U7.5@238,181.4 282.13,181.4 cw(c282.13,156.13) C104.2@300,174 ; v1(285,189) C104.2@300,174 ; v1(315,189) C104.2@300,174 ; C124.2@354,174 C104.2@300,174 ; C120.1@360,656.54 371.22,645.32 C100.1@405,645.32 405.32,645 v1(415,645)
  Signal Layer 1 w10: v1(265,360) 285,360 ; v1(607.88,484.21) v1@614.21,484.21
  Signal Layer 1 w20: v1(285,189) 285,360 285,515 v1(275,525) 275,550 v1(370,645) ; 420,200 v1(435,215) ; v1(470,215) 470,205 454,189 396,189 ; v1(530,215) 530,185 485,140 445,140 396,189 ; v1(535,645) v1(370,645) ; v1(595,655) 570,680 405,680 v1(370,645) ; v1(600,215) 600,160 530,90 450,90 351,189 ; v1(685,305) 685,185 565,65 439,65 v1(315,189) 351,189 ; 351,189 396,189
  Bottom Layer w10: C118.1@286.54,480 275,491.54 v1(275,525) C87.1@320.32,525
  Bottom Layer w20: C79.2@620,475 C119.1@620,516.54 ; C119.1@625,521.54 v1(625,590)
  other v1: 445,645
5V: C21.2 C22.2 C23.2 C24.1 C25.2 C29.1 C30.1 C31.1 C32.1 C42.2 C43.1 C44.1 C45.1 C105.2 C107.2 C115.2 L2.2 R12.1 R16.1 R60.1 R63.2 U2.1 U2.3 U3.8 U3.9 U3.18 U3.19 U3.20 U6.3 U7.1 U7.3 U8.1 U8.3 U10.1 U10.3 USB1.1 USB2.1 | length 6975
  Top Layer w10: U7.3@134.82,106 161,106 175,120 175,170 163.6,181.4 U7.1@134.82,181.4 ; U8.1@1079.18,1715.6 1049.4,1715.6 1040,1725 1040,1780 1051,1791 U8.3@1079.18,1791 ; U2.1@1126.19,1192.6 1102.4,1192.6 1090,1205 1090,1260 1098,1268 U2.3@1126.19,1268 ; C30.1@1220,958.46 1220,980 v1(1220,994.68) ; v1@1305,560 v1(1305,565) U3.8@1305,599.29 ; 1324.69,560.32 U3.9@1324.69,599.29 ; v1(1385,1880) 1386,1881 R16.1@1407.31,1881 C43.1@1407.31,1916
  Top Layer w12: U3.20@1265.63,760.71 C23.2@1265.63,800.95 ; C23.2@1269.69,805 1285.31,789.37 ; C45.1@1269.69,840 1289.69,820 C24.1@1316.54,820 ; U3.19@1285.31,760.71 1285.31,789.37 ; U3.18@1305,760.71 C24.1@1305,808.46 ; C32.1@1306.81,996.5 U6.3@1350.83,996.5 ; v1(1320,845) 1320,823.46 C24.1@1316.54,820 ; v1(1335,820) C24.1@1316.54,820 ; v1(1435,850) 1450,835 C25.2@1455,835 v1(1455,830) ; 1285.31,789.37 1285.91,789.37 C24.1@1305,808.46 ; C24.1@1305,808.46 C24.1@1316.54,820
  Top Layer w15: USB1.1@716.18,1794.69 v1(716.18,1838.82) ; U8.3@1080,1791.81 v1(1080,1810)
  Top Layer w20: C105.2@70,179 cw(c75.8,173.2) 75.8,181.4 U7.1@134.82,181.4 ; U8.1@1079.18,1715.6 C107.2@1139.6,1715.6 ; R63.2@1091,605 v1(1110,586) ; U2.1@1126.19,1192.6 C42.2@1186.6,1192.6 ; C29.1@1160,965 1205,965 1220,980 1234.69,994.68 C31.1@1270,994.68 ; C42.2@1190,1196 1301,1196 v1(1305,1200) v1(1335,1200) ; v1(1270,1005) C31.1@1270,994.68 ; C22.2@1300,555 v1(1345,555) ; C32.1@1305,994.68 C31.1@1270,994.68 ; C44.1@1486.48,1479 cw(c1421.24,1413.76) 1513.5,1413.76 R12.1@1513.5,1191.18
  Top Layer w30: C107.2@1140,1706.57 L2.2@1320,1526.57 1438.91,1526.57 C44.1@1486.48,1479
  Top Layer w60: v1(1320,1490) L2.2@1320,1526.57
  Signal Layer 1 w15: v1(258.82,1756.18) 272.64,1770 500,1770 534.37,1804.37 534.37,1834.37 570,1870 760,1870 790,1840 1050,1840 v1(1080,1810) ; v1(716.18,1838.82) 716.18,1868.82
  Bottom Layer w10: v1(258.82,1756.18) USB2.1@258.82,1799.69 ; v1(1110,586) 1279,586 v1@1305,560 ; v1(1335,1510) 1335,1830 v1(1385,1880) ; U10.1@1534.81,483.6 1563.6,483.6 1575,495 1575,550 1566,559 U10.3@1534.81,559
  Bottom Layer w12: 1407.5,782.5 v1(1455,830) ; 1407.5,822.5 v1(1435,850)
  Bottom Layer w15: v1(1220,994.68) 1320,994.68
  Bottom Layer w20: v1(138.54,186.46) 160.71,164.29 ccw(c231.42,235) 231.42,135 863.58,135 ccw(c863.58,235) 934.29,164.29 1330,560 1404,486 C115.2@1475,486 ; v1(1270,1005) 1320,1005 ; C115.2@1477.4,483.6 U10.1@1534.81,483.6
  Bottom Layer w60: v1(1320,1490) 1320,1470 1320,1005 1320,994.68 1320,870 1407.5,782.5 1440,750 1440,670 1330,560
  other v1: 1320,1465 1295,1490 1345,1490 1310,1510
AGND: C54.1 C55.1 C62.1 C63.1 C65.2 C66.2 C67.2 C68.2 C69.2 C70.2 C71.2 C102.1 C103.1 MCU1.12 OP1.11 OP2.5 OP2.11 OP3.11 R55.2 R59.2 | length 833.2
  Top Layer w10: v1(490,1125) R59.2@490,1140 ; C66.2@570,1060 v1(635,1060) ; C103.1@720.32,1131.22 C102.1@720.32,1175 728.9,1183.58 MCU1.12@728.9,1246.5 ; C67.2@835,890 v1(835,910)
  Bottom Layer w10: C63.1@190,710.32 ccw(c190,745.32) C68.2@225,745.32 ; v1(220,845) OP2.11@220,808.86 220,755 ccw(c225,755) C68.2@225,750 ; OP2.5@245.59,1041.14 ccw(c322.2,1041.14) v1@268.03,986.97 ; C55.1@500,710.32 520.32,710.32 ccw(c520.32,725) 535,725 C70.2@535,750 535,803.86 ccw(c530,803.86) OP3.11@530,808.86 v1(530,840) ; R55.2@610,1140 C71.2@610,1100 v1(625,1115) ; v1(750,1140) 804.68,1140 810,1134.69 C54.1@860,1134.69 ; C69.2@825,745 v1(845,750) ; v1(835,990) OP1.11@835,1036.14
  other v1: 270,985
CLOCK40M: C113.2 MAX.30 | length 53.1
  Top Layer w10: C113.2@265,560 ccw(c305.4,600.4) 305.4,543.27 MAX.30@313.58,543.27